# Altium PCB pcb.PcbDoc (part 2 of 2)
Units mm, origin at the board's own origin, x right, y up, seen from the top; angles counter-clockwise.
Board outline 78.1 x 58.42 mm, 2 copper layers (Top Layer, Bottom Layer); 90 components, 71 nets, 303 pads, 67 vias.
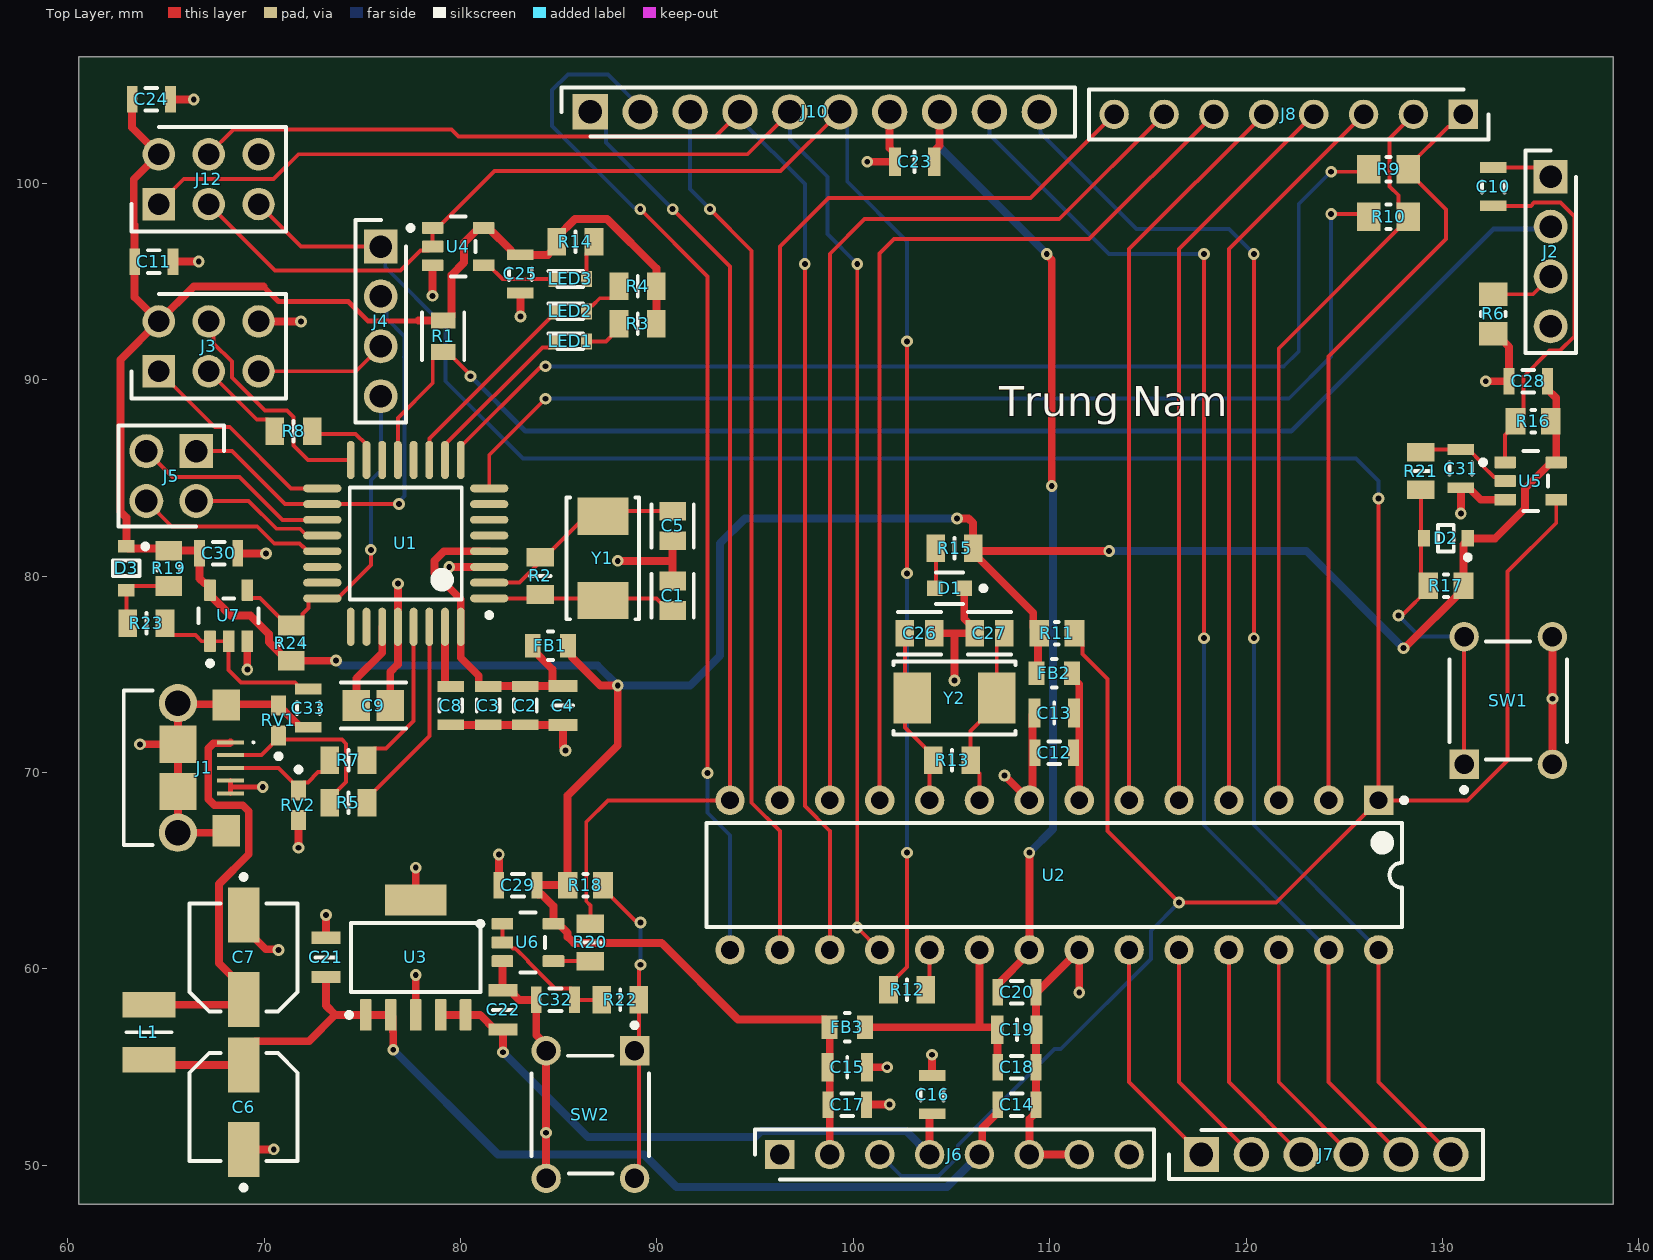
[diagram p0: Top Layer view]

## Via types
v1: diameter 0.6, hole 0.3, Top Layer to Bottom Layer, 67 vias

## Nets (pads, with @x,y where several pads share a name; then routed paths per layer and width w, separated by ;. In a path a pad name is that pad's centre, name@x,y a point inside that pad or via, vN(x,y) a via of type N, cw(c..) or ccw(c..) an arc to the next point about the centre after c; other vN are vias at no path point) (continued)
pads on no net: J2.4 J6.1 J6.8 J12.6 U1.5 U1.6 U1.7 U1.12 U1.14 U1.22 U1.23 U1.25 U1.26

## Polygon pours and split planes (outlines as drawn)
GND on Bottom Layer "GND_L02_P000" (solid, pour order 0): 60.706,106.172 60.706,48.26 138.43,48.26 138.684,48.006 138.684,106.426

## Silkscreen, mask and mechanical layers (free items; w line width, h text height)
Top Overlay:
  text "Trung Nam" at 107.442,88.138 h1.52
Mechanical 1:
  the board outline again, w0.254